# Altium PCB Tomashevich.pcbdoc
Units mm, origin at the board's own origin, x right, y up, seen from the top; angles counter-clockwise.
Board outline 60 x 40 mm, 2 copper layers (Top Layer, Bottom Layer); 19 components, 14 nets, 59 pads, 7 vias.
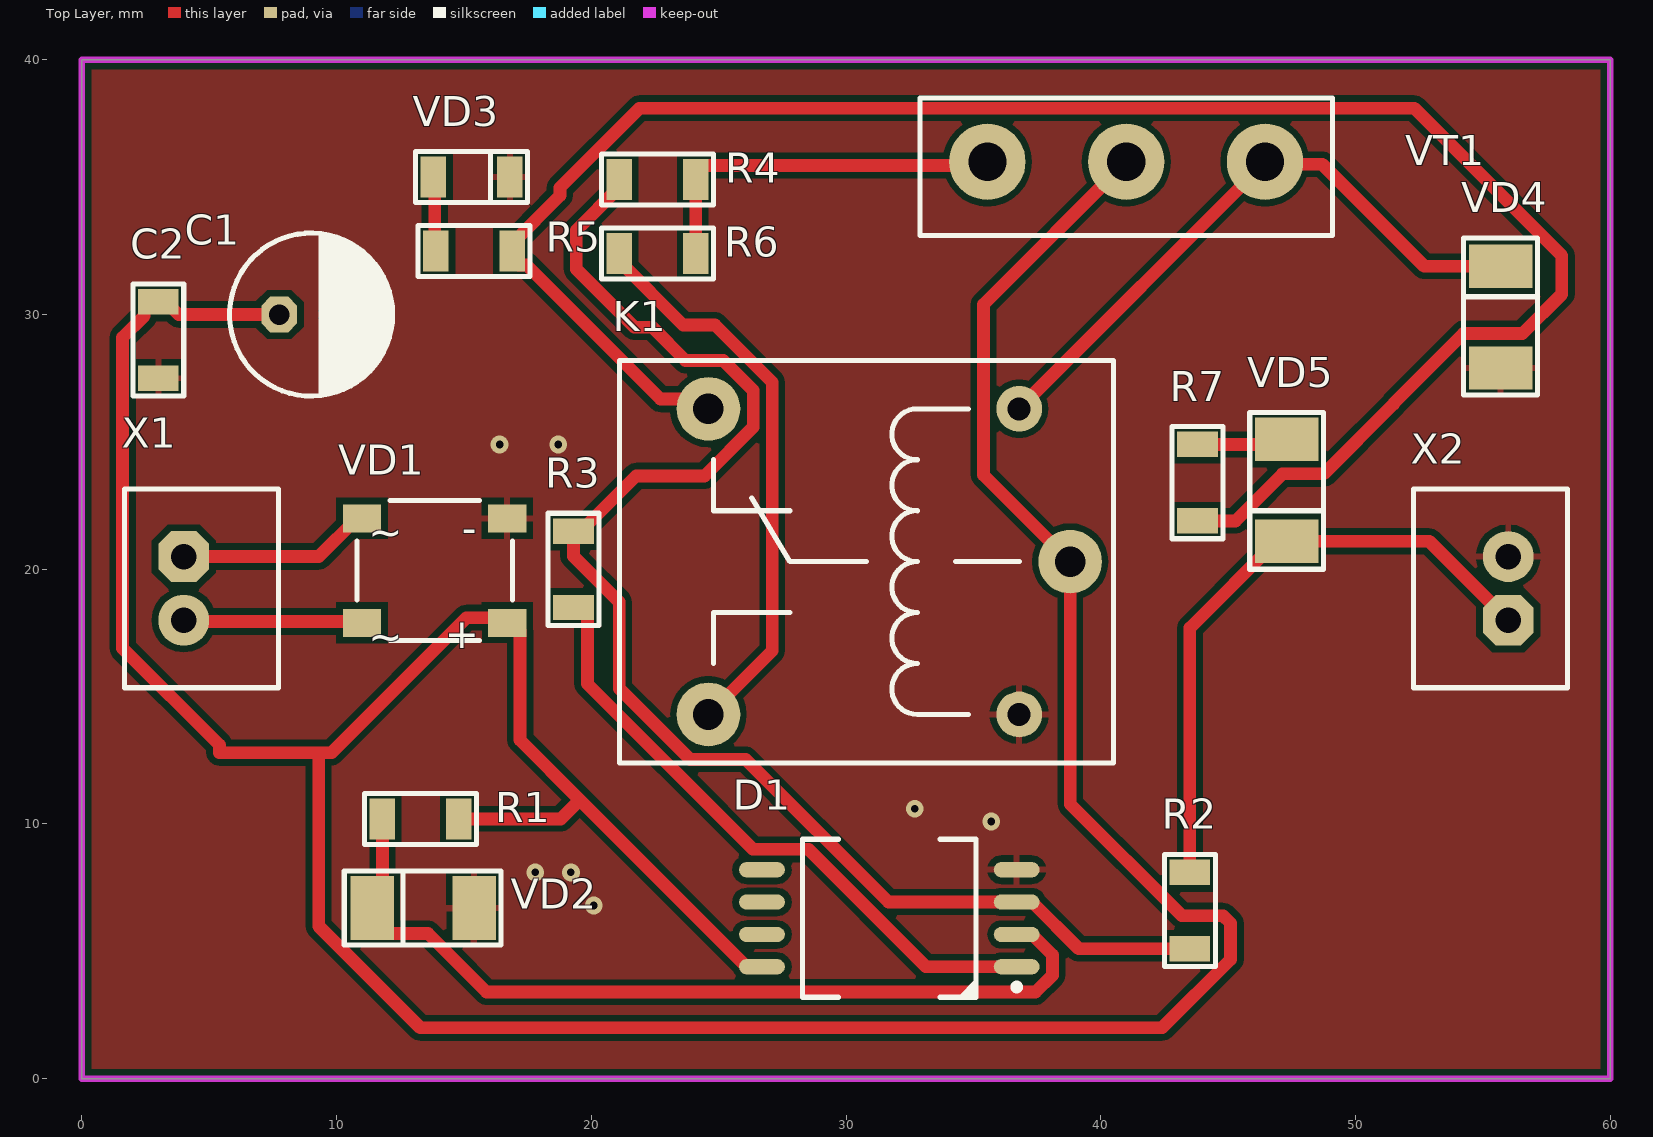
[diagram p0: Top Layer view]
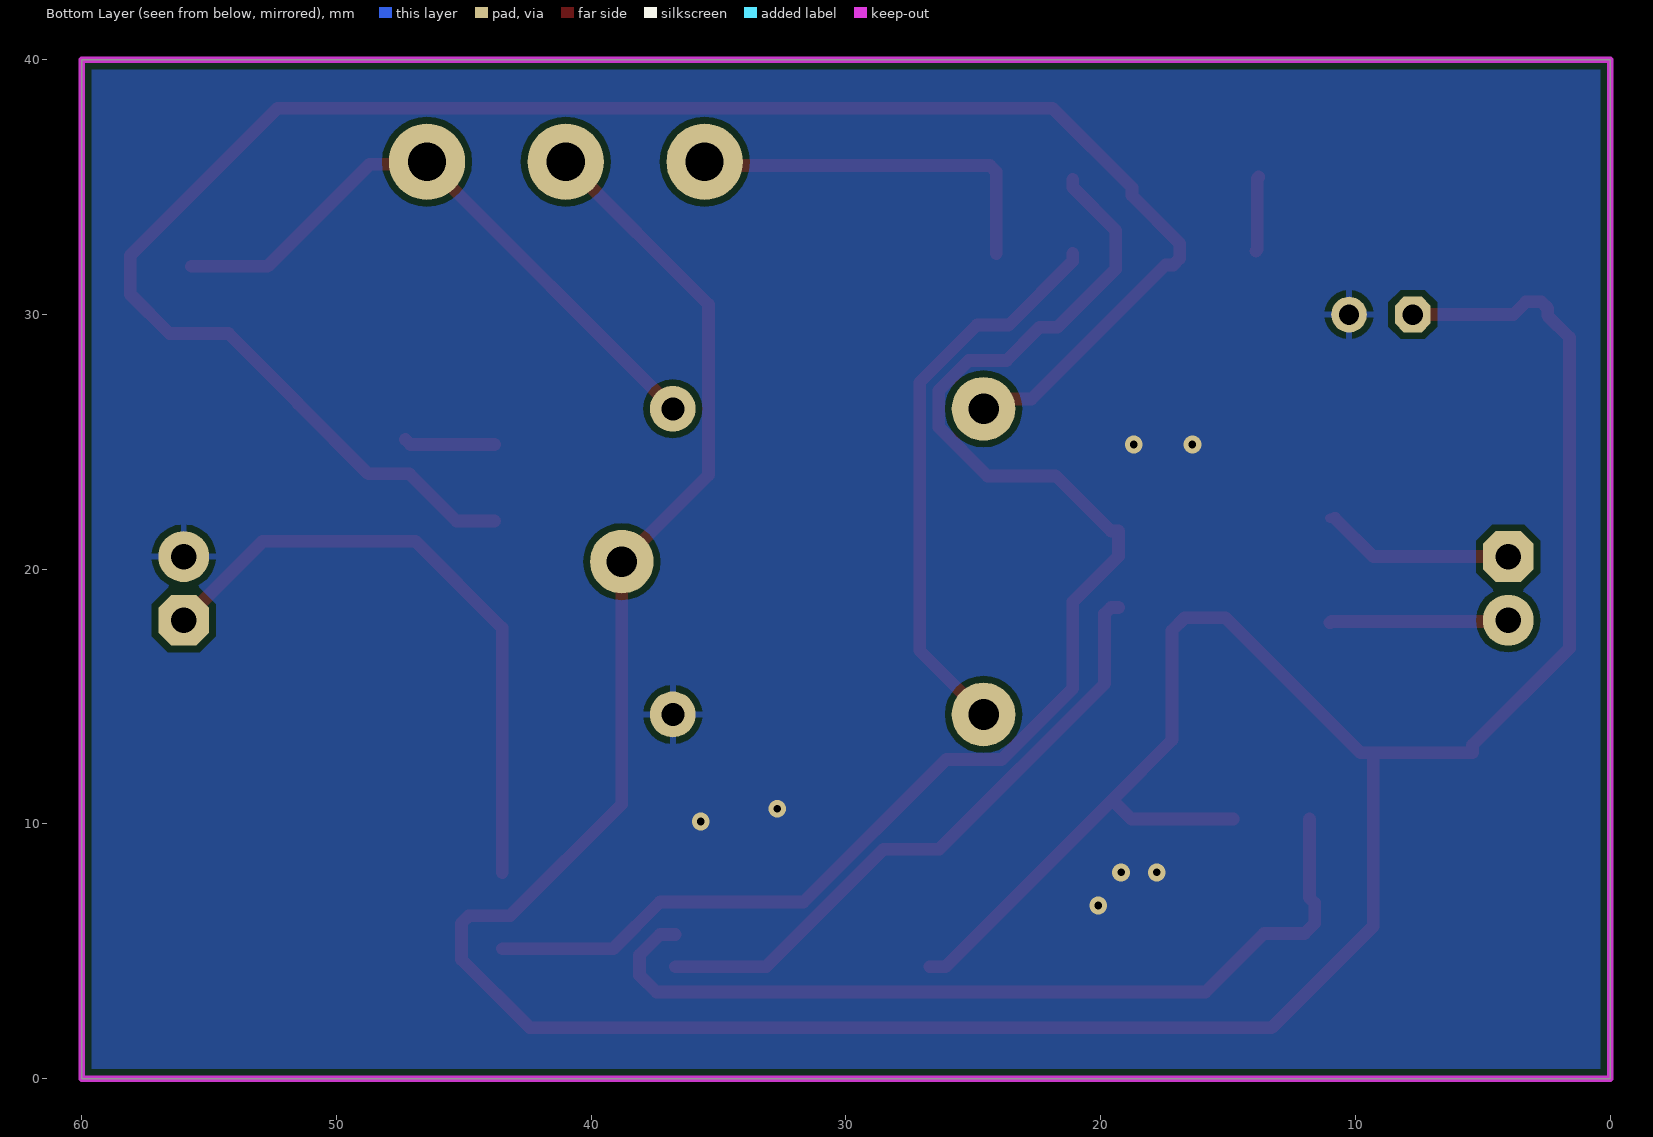
[diagram p1: Bottom Layer view, seen from below]
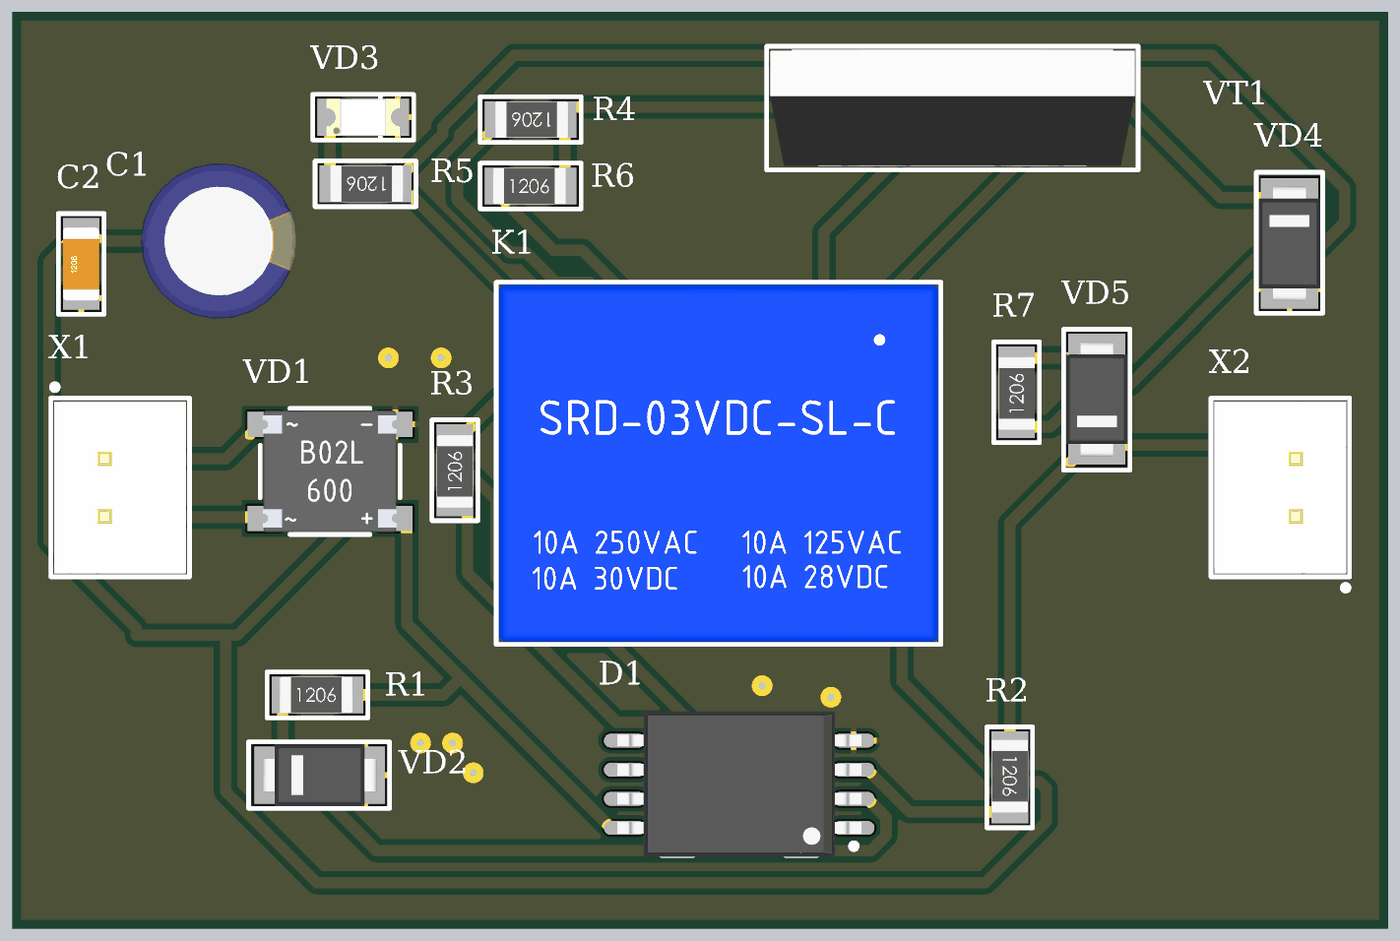
[diagram p2: 3D render of the assembled board from above, using the file's embedded part models]

## Layer stack, top to bottom
Top Solder: solder mask 0.0102, Solder Resist, Dk 3.5
Top Layer: signal copper 0.0356
Dielectric 1: dielectric 0.32, FR-4, Dk 4.8
Bottom Layer: signal copper 0.0356
Bottom Solder: solder mask 0.0102, Solder Resist, Dk 3.5

## Board outline
0,0 60,0 60,40 0,40

## Design rules (kind name [scope] priority, off if disabled: settings)
Clearance [All] p1: gap=0.254 ignorepadtopadclearanceinfootprint=FALSE except(0: Arc-Hole Track-Hole SMDPad-Hole THPad-Hole Via-Hole Fill-Hole Poly-Hole Region-Hole Text-Hole)
Height [All] p1: minheight=0 maxheight=33.02 prefheight=12.7
PolygonConnect [All] p1: connectstyle=Relief reliefconductorwidth=0.254 reliefentries=4 polygonreliefangle="90 Angle" airgapwidth=0.254
RoutingVias [All] p1: holewidth=0.711 width=1.27 viastyle="Through Hole" minholewidth=0.711 minwidth=1.27 maxholewidth=0.711 maxwidth=1.27
SolderMaskExpansion [All] p1: expansion=0.102 istentingtop=FALSE
Width [All] p1: maxlimit=5 minlimit=0.254 preferedwidth=0.5 minimp=50.000000 maximp=50.000000 favimp=50.000000
29 further rules are at their usual default settings.

## Components (designator, comment, footprint, x,y, rotation, side; value= is the part's Value field where it differs from the comment)
C1 "Aluminium capacitor, 330μF, 25V, ±20%, 54mOhm, 14x10x5 mm, -55...+105°C" "CAP: D6.3C2.5H11" 9,30 r0 top value=330μF
C2 "Ceramic capacitor, 0.1μF, X7R, ±10%, 50V, 1206, -55...+125°C" "CAP: 1206" 3,29 r90 top value=0.1μF
D1 "IC isolator amplifier, Differential, 100 kHz, 2.7...5.5V, -40...+105°C, 8-SOIC" 8-SOIC-W 31.7,6.3 r180 top
K1 "Electromechanics relay, 3VDC, 250VAC, 10A, 1NO, -40...+85°C" "REL: SRD-03VDC" 30.8,20.3 r0 top
R1 "Resistor film, 100R, ±5%, 1206, 0.25W, -55...+125°C" "RES: 1206" 13.3,10.2 r0 top value=100R
R2 "Resistor film, 100R, ±5%, 1206, 0.25W, -55...+125°C" "RES: 1206" 43.5,6.6 r270 top value=100R
R3 "Resistor film, 100R, ±5%, 1206, 0.25W, -55...+125°C" "RES: 1206" 19.3,20 r90 top value=100R
R4 "Resistor film, 100R, ±5%, 1206, 0.25W, -55...+125°C" "RES: 1206" 22.6,35.3 r180 top value=100R
R5 "Resistor film, 100R, ±5%, 1206, 0.25W, -55...+125°C" "RES: 1206" 15.4,32.5 r180 top value=100R
R6 "Resistor film, 100R, ±5%, 1206, 0.25W, -55...+125°C" "RES: 1206" 22.6,32.4 r0 top value=100R
R7 "Resistor film, 100R, ±5%, 1206, 0.25W, -55...+125°C" "RES: 1206" 43.8,23.4 r90 top value=100R
VD1 "Single phase rectifier, 600V, 2A, 1.1V, 4-SMD, -55...+150°C" "DIODE: CD-MBL2" 11,17.9 r0 top
VD2 "Zener diode, 5.1V, 500mW, 0.9V, 17Ohm, SOD-123, -55...+150°C" "DIODE: SMA" 13.4,6.7 r180 top
VD3 "LED, Green, *, *, *, -55...+150°C" "LED: 1206G" 15.3,35.4 r0 top
VD4 "Single diode, 75V, 150mA, 1V, 4ns, SOD-323, -55...+150°C" "DIODE: SMA" 55.7,29.9 r90 top
VD5 "Schottky diode, 80V, 500mA, 1V, 15pF, SOD-123, -55...+150°C" "DIODE: SMA" 47.3,23.1 r270 top
VT1 "transistor" TO247 41,36 r0 top
X1 "Connector, 2pin, 2.54mm, 250VAC, 3A" "CON: CWF-2" 4,19.25 r270 top
X2 "Connector, 2pin, 2.54mm, 250VAC, 3A" "CON: CWF-2" 56,19.25 r90 top

## Footprints (in the part's own frame and the unit in brackets; to place one, negate y for a bottom-side part, rotate by r counter-clockwise, add the part's x,y. Pads: shape width x height; smd on the part's side, far side on the other; paste and mask are expansions set on the pad)
8-SOIC-W [mm] "pitch 1.27 mm, isolator"
  oval 1.8x0.6 smd: 1(-5,1.905) 2(-5,0.635) 3(-5,-0.635) 4(-5,-1.905) 5(5,-1.905) 6(5,-0.635) 7(5,0.635) 8(5,1.905)
  round 0.5 on Mech1: ""(-4.8,2.7)
  silkscreen extent -5.13,-3.1 3.4,3.1, body extent -5.32,-3.18 5.32,3.17, height 1.7
"CAP: 1206" [mm]
  rect 1x1.6 smd: 1(-1.5,0) 2(1.5,0)
  silkscreen extent -2.2,-1 2.2,1, body extent -1.6,-0.8 1.6,0.8, height 1
"CAP: D6.3C2.5H11" [mm]
  oct 1.4x1.4 hole 0.8: 1(-1.25,0)
  round 1.4 hole 0.8: 2(1.25,0)
  silkscreen extent -3.2,-3.2 3.2,3.2, body extent -3.4,-3.4 3.4,3.4, height 12.5
"CON: CWF-2" [mm]
  oct 2x2 hole 1: 1(-1.25,0)
  round 2 hole 1: 2(1.25,0)
  round 0.5 on Top Overlay: ""(-4.375,-2.15)
  round 0.5 on Mech1: ""(-3.2,-1.7)
  silkscreen extent -3.9,-2.32 3.9,3.72, body extent -3.75,-2.18 3.75,3.57, height 7
"DIODE: CD-MBL2" [mm]
  rect 1.5x1.1 smd: 1(5.7,4.1) 2(0,4.1) 3(5.7,0) 4(0,0)
  silkscreen extent -0.2,-0.7 5.9,4.8, body extent -0.07,-0.6 5.77,4.7, height 1.22
"DIODE: SMA" [mm]
  rect 1.7x2.5 smd: 1(-2,0) 2(2,0)
  round 0.5 on Mech1: ""(2,0.9)
  silkscreen extent -3.05,-1.45 3.1,1.45, body extent -2.5,-1.35 2.5,1.35, height 2.28
"LED: 1206G" [mm]
  rect 1x1.6 smd: 1(-1.5,0) 2(1.5,0)
  silkscreen extent -2.2,-1 2.2,1, body extent -1.6,-0.8 1.6,0.8, height 1.1
"REL: SRD-03VDC" [mm]
  round 1.8 hole 0.9: 1(6,-6) 2(6,6)
  round 2.5 hole 1.2: 3(8,0) 4(-6.2,6) 5(-6.2,-6)
  silkscreen extent -9.7,-7.9 9.7,7.9, body extent -9.6,-7.8 9.6,7.8, height 15.8
"RES: 1206" [mm]
  rect 1x1.6 smd: 1(-1.5,0) 2(1.5,0)
  silkscreen extent -2.2,-1 2.2,1, body extent -1.65,-0.8 1.55,0.8, height 0.47
TO247 [mm] "3-Lead Plastic TO-247"
  round 3 hole 1.5: 1(-5.45,0) 2(0,0) 3(5.45,0)
  round 0.5 on Mech1: ""(-7.4,-2.3)
  silkscreen extent -8.1,-2.9 8.1,2.5, body extent -7.95,-2.75 7.95,2.35, height 26.95

## Part data
C1: library part Aluminium, Manufacturer=Wurth, Package="14x10x5 mm", PartNumber=860080475013, Temperature=-55...+105°C, Tolerance=±20%, TypeCapacitor="Aluminium capacitor", Voltage=25V, HelpURL=https://www.digikey.com/product-detail/en/wurth-electronics-inc/860080475013/732-9029-1-ND/5728972, Impedance=54mOhm, ValueManufacturerPartNumber="Aluminium capacitor, 330μF, 25V, ±20%, 54mOhm, 14x10x5 mm, -55...+105°C"
C2: library part Ceramic_1206, Manufacturer=Yageo, Package=1206, PartNumber=CC1206KRX7R9BB104, Temperature=-55...+125°C, Tolerance=±10%, TypeCapacitor="Ceramic capacitor", TypeDielectric=X7R, Voltage=50V, HelpURL=https://www.digikey.com/product-detail/en/yageo/CC1206KRX7R9BB104/311-1179-1-ND/303089, ValueManufacturerPartNumber="Ceramic capacitor, 0.1μF, X7R, ±10%, 50V, 1206, -55...+125°C"
D1: library part AMC1200BDWVR, "Isolator amplifier", Manufacturer="Texas Instruments", Package=8-SOIC, Temperature=-40...+105°C, ComponentType="IC isolator amplifier", GainBandwidth="100 kHz", HelpURL=https://www.digikey.com/product-detail/en/texas-instruments/AMC1200BDWVR/296-39898-1-ND/5177775, OutputType=Differential, PartNumber=AMC1200BDWVR, Supply=2.7...5.5V, ValueManufacturerPartNumber="IC isolator amplifier, Differential, 100 kHz, 2.7...5.5V, -40...+105°C, 8-SOIC"
K1: library part Relay_SRD-03VDC, Manufacturer="Ningbo Songle", MaxCurrent=10A, Package=1NO, PartNumber=SRD-03VDC, Temperature=-40...+85°C, VoltageControlCoil=3VDC, VoltageMax=250VAC, HelpURL=https://lcsc.com/product-detail/Relays_SRD-03VDC-SL-C_C24585.html, TypeRelay="Electromechanics relay", ValueManufacturerPartNumber="Electromechanics relay, 3VDC, 250VAC, 10A, 1NO, -40...+85°C"
R1 R2 R3 R4 R5 R6 R7: library part Resistor_1206, Manufacturer=Yageo, Package=1206, PartNumber=RC1206JR-07100RL, Power=0.25W, Temperature=-55...+125°C, Tolerance=±5%, TypeResistor="Resistor film", HelpURL=https://www.digikey.com/product-detail/en/yageo/RC1206JR-07100RL/311-100ERCT-ND/732153, ValueManufacturerPartNumber="Resistor film, 100R, ±5%, 1206, 0.25W, -55...+125°C"
VD1: library part "1PH rectifier", Current=2A, Manufacturer="Comchip Technology", Package=4-SMD, PartNumber=DF206ST-G, Temperature=-55...+150°C, Voltage=600V, VoltageDrop=1.1V, HelpURL=https://www.digikey.com/product-detail/en/comchip-technology/DF206ST-G/641-1425-1-ND/2208797, TypeDiode="Single phase rectifier", ValueManufacturerPartNumber="Single phase rectifier, 600V, 2A, 1.1V, 4-SMD, -55...+150°C"
VD2: library part Zener_single, Current=500mW, Manufacturer="Diodes Incorporated", Package=SOD-123, PartNumber=MMSZ5231B-7-F, Temperature=-55...+150°C, Voltage=5.1V, VoltageDrop=0.9V, HelpURL=https://www.digikey.com/product-detail/en/diodes-incorporated/MMSZ5231B-7-F/MMSZ5231B-FDICT-ND/755506, RecoveryTime=17Ohm, TypeDiode="Zener diode", ValueManufacturerPartNumber="Zener diode, 5.1V, 500mW, 0.9V, 17Ohm, SOD-123, -55...+150°C"
VD3: library part LED_single, Color=GREEN, ColorParameter=Green, Temperature=-55...+150°C, TypeDiode=LED, ValueManufacturerPartNumber="LED, Green, *, *, *, -55...+150°C"
VD4: library part Diode_single, Current=150mA, Manufacturer="Micro Commercial", Package=SOD-323, PartNumber=1N4148WX-TP, Temperature=-55...+150°C, Voltage=75V, VoltageDrop=1V, HelpURL=https://www.digikey.com/product-detail/en/micro-commercial-co/1N4148WX-TP/1N4148WXTPMSCT-ND/717312, RecoveryTime=4ns, TypeDiode="Single diode", ValueManufacturerPartNumber="Single diode, 75V, 150mA, 1V, 4ns, SOD-323, -55...+150°C"
VD5: library part Schottky_single, Current=500mA, Manufacturer="Diodes Incorporated", Package=SOD-123, PartNumber=MBR0580S1-7, Temperature=-55...+150°C, Voltage=80V, VoltageDrop=1V, HelpURL=https://www.digikey.com/product-detail/en/diodes-incorporated/MBR0580S1-7/MBR0580S1-7DICT-ND/5080371, RecoveryTime=15pF, TypeDiode="Schottky diode", ValueManufacturerPartNumber="Schottky diode, 80V, 500mA, 1V, 15pF, SOD-123, -55...+150°C"
X1 X2: library part CWF-2, CurrentMax=3A, Manufacturer=Connfly, PartNumber=CWF-2R, VoltageMax=250VAC, CommentText="\"Разъем\"", HelpURL=https://www.chipdip.ru/product/cwf-2r-ds1069-2-mr, Multichannel=2pin, Pitch=2.54mm, TypeConnector=Connector, ValueManufacturerPartNumber="Connector, 2pin, 2.54mm, 250VAC, 3A"

## Via types
v1: diameter 0.7, hole 0.3, Top Layer to Bottom Layer, 7 vias

## Nets (pads, with @x,y where several pads share a name; then routed paths per layer and width w, separated by ;. In a path a pad name is that pad's centre, name@x,y a point inside that pad or via, vN(x,y) a via of type N, cw(c..) or ccw(c..) an arc to the next point about the centre after c; other vN are vias at no path point)
GND: C1.2 C2.1 D1.4 K1.1 VD1.1 VD2.1 VD3.2 VD4.1 X2.2
  other v1: 20.1,6.8 17.8,8.1 19.2,8.1 35.7,10.1 32.7,10.6 16.4,24.9 18.7,24.9
NetC1_1: C1.1 C2.2 D1.8 K1.3 R1.2 VD1.3 VT1.2 | length 145.7
  Top Layer w0.5: C1.1 3.8,30 3.3,30.5 C2.2 2.7,30.5 2.45,30.25 2.45,29.95 1.6,29.1 1.6,16.9 5.4,13.1 5.4,12.8 9.3,12.8 ; R1.2 18.8,10.2 19.547,10.948 ; D1.8 26.1,4.395 19.547,10.948 ; VT1.2 35.396,30.396 35.396,23.704 K1.3 38.8,10.787 43.187,6.4 44.8,6.4 45.093,6.107 45.093,4.68 42.413,2 13.287,2 9.3,5.987 9.3,12.8 ; 9.3,12.8 9.8,12.8 15.1,18.1 16.7,18.1 17.2,17.6 17.2,13.295 19.547,10.948
NetD1_1: D1.1 R3.1 | length 24.9
  Top Layer w0.5: R3.1 19.6,18.5 19.85,18.25 19.85,15.503 26.344,9.009 28.525,9.009 33.139,4.395 D1.1
NetD1_2: D1.2 R1.1 VD2.2 | length 34.6
  Top Layer w0.5: R1.1 11.8,7.1 11.6,6.9 11.6,6.1 12,5.7 13.587,5.7 15.887,3.4 37.442,3.4 38.104,4.062 38.104,4.861 37.3,5.665 D1.2
NetD1_3: D1.3 R2.2 R3.2 R4.2 | length 56.9
  Top Layer w0.5: R4.2 21.1,35 19.407,33.307 19.407,31.793 21.7,29.5 22.4,29.5 23.7,28.2 25.181,28.2 26.354,27.027 26.354,25.573 24.442,23.662 21.762,23.662 19.6,21.5 R3.2 19.3,20.513 21.1,18.713 21.1,15.319 23.883,12.537 26.063,12.537 31.665,6.935 D1.3 37.3,6.935 39.135,5.1 R2.2
NetK1_2: K1.2 VD4.2 VT1.3 | length 24.6
  Top Layer w0.5: K1.2 36.8,26.325 46.45,35.975 VT1.3 46.55,35.9 48.7,35.9 52.7,31.9 VD4.2
NetK1_4: K1.4 R5.1 R7.1 | length 76.2
  Top Layer w0.5: K1.4 24.217,26.683 22.717,26.683 17.45,31.95 17.15,31.95 16.9,32.2 R5.1 16.9,32.8 18.771,34.671 18.771,34.983 21.887,38.1 52.313,38.1 58.1,32.313 58.1,30.8 56.554,29.254 54.241,29.254 51.5,26.513 51.5,26.487 48.759,23.746 47.133,23.746 45.287,21.9 R7.1
NetK1_5: K1.5 R6.1 | length 22.4
  Top Layer w0.5: R6.1 21.1,32.1 23.606,29.594 24.852,29.594 27.108,27.339 27.108,16.808 K1.5
NetR2_1: R2.1 VD5.2 X2.1 | length 24.8
  Top Layer w0.5: R2.1 43.5,17.7 46.9,21.1 VD5.2 52.9,21.1 X2.1
NetR4_1: R4.1 R6.2 VT1.1 | length 14.8
  Top Layer w0.5: R6.2 R4.1 24.1,35.6 24.35,35.85 35.4,35.85 VT1.1
NetR5_2: R5.2 VD3.1 | length 2.9
  Top Layer w0.5: VD3.1 13.85,35.35 13.85,32.55 R5.2
NetR7_2: R7.2 VD5.1 | length 3.6
  Top Layer w0.5: R7.2 47.1,24.9 VD5.1
NetVD1_2: VD1.2 X1.1 | length 7.6
  Top Layer w0.381: VD1.2@10.8,22 VD1.2
  Top Layer w0.5: X1.1 9.3,20.5 VD1.2@10.8,22
NetVD1_4: VD1.4 X1.2 | length 7
  Top Layer w0.5: X1.2 4.05,17.95 10.95,17.95 VD1.4
pads on no net: D1. D1.5 D1.6 D1.7 VD2. VD4. VD5. VT1. X1. X2.

## Polygon pours and split planes (outlines as drawn)
GND on Top Layer "GND_L01_P000" (solid, pour order 0): 0,0 60,0 60,40 0,40
GND on Bottom Layer "GND_L02_P001" (solid, pour order 1): 0,0 60,0 60,40 0,40

## Keep-outs
Keep-Out Layer:
  the board outline again, w0.254

## Text inside footprints (layer, text, board x,y; h text height)
VD1: Top Overlay "-" at 15.5,22.3 h2 r180; Top Overlay "+" at 15.6,18.3 h2 r180; Top Overlay "~" at 12.6,18.2 h2 r180; Top Overlay "~" at 12.6,22.3 h2 r180; Mechanical 1 "+" at 16.2,18.3 h2 r180; Mechanical 1 "-" at 16.2,22.3 h2 r180; Mechanical 1 "~" at 11.9,22.3 h2 r180; Mechanical 1 "~" at 11.9,18.2 h2 r180